# EAGLE board 4081_4 (EAGLE 5.06)
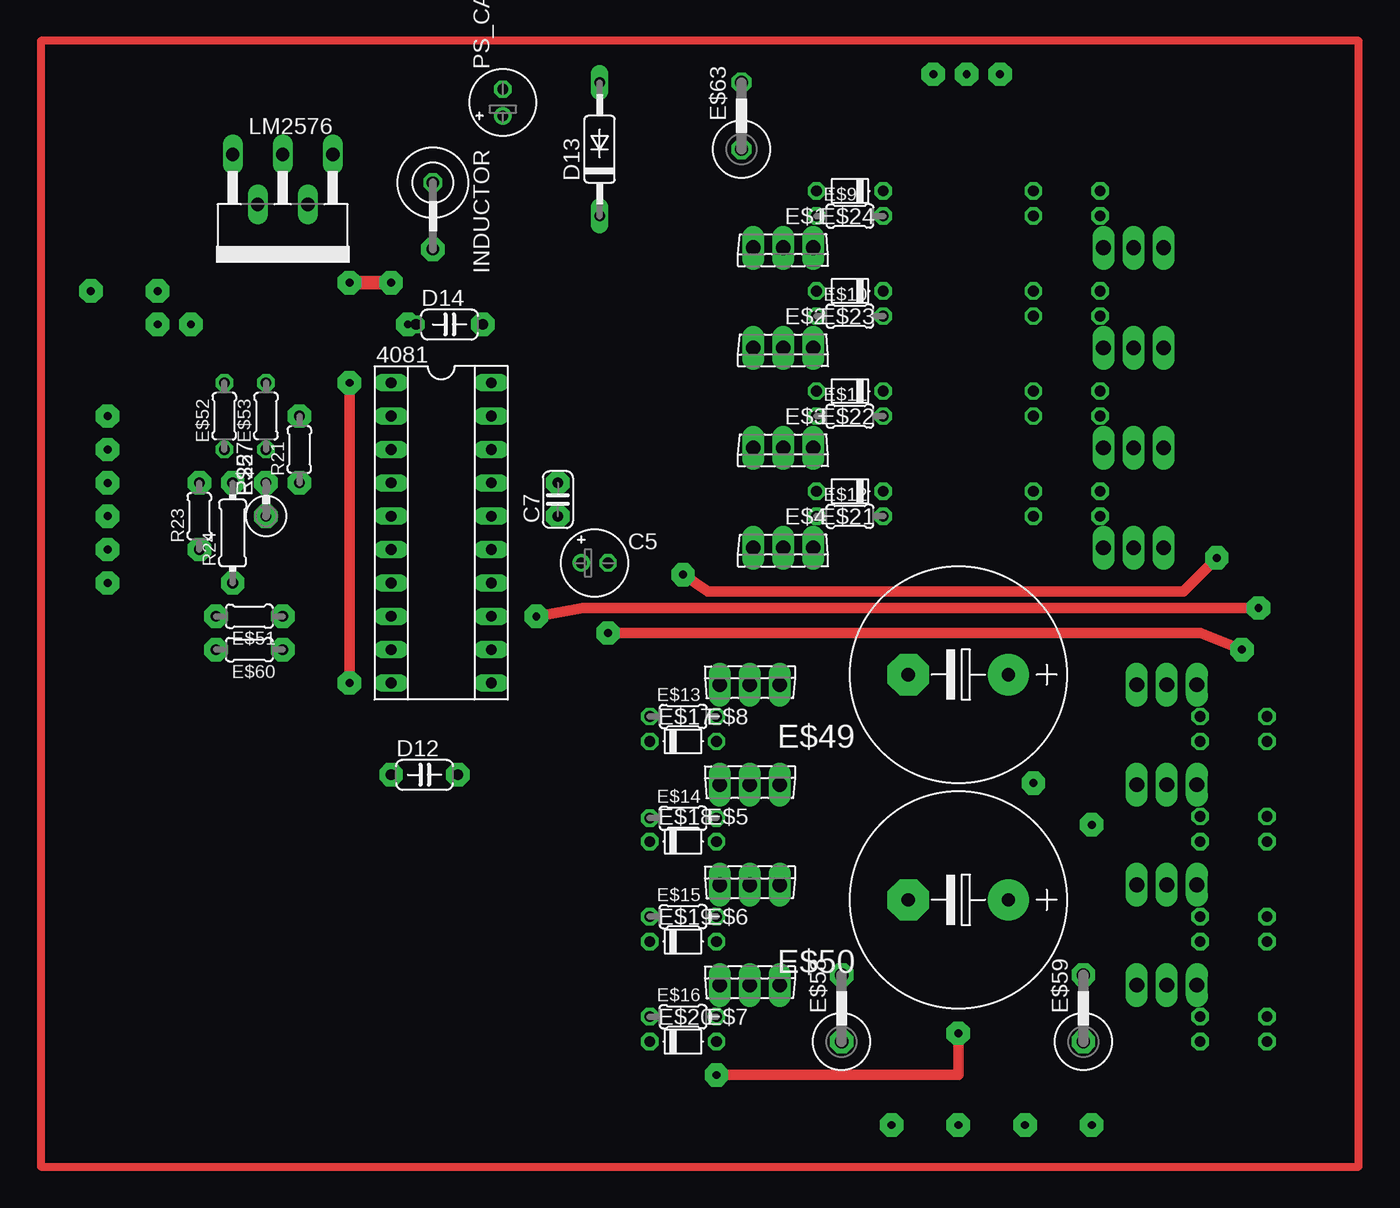
[diagram p0: board, top side]
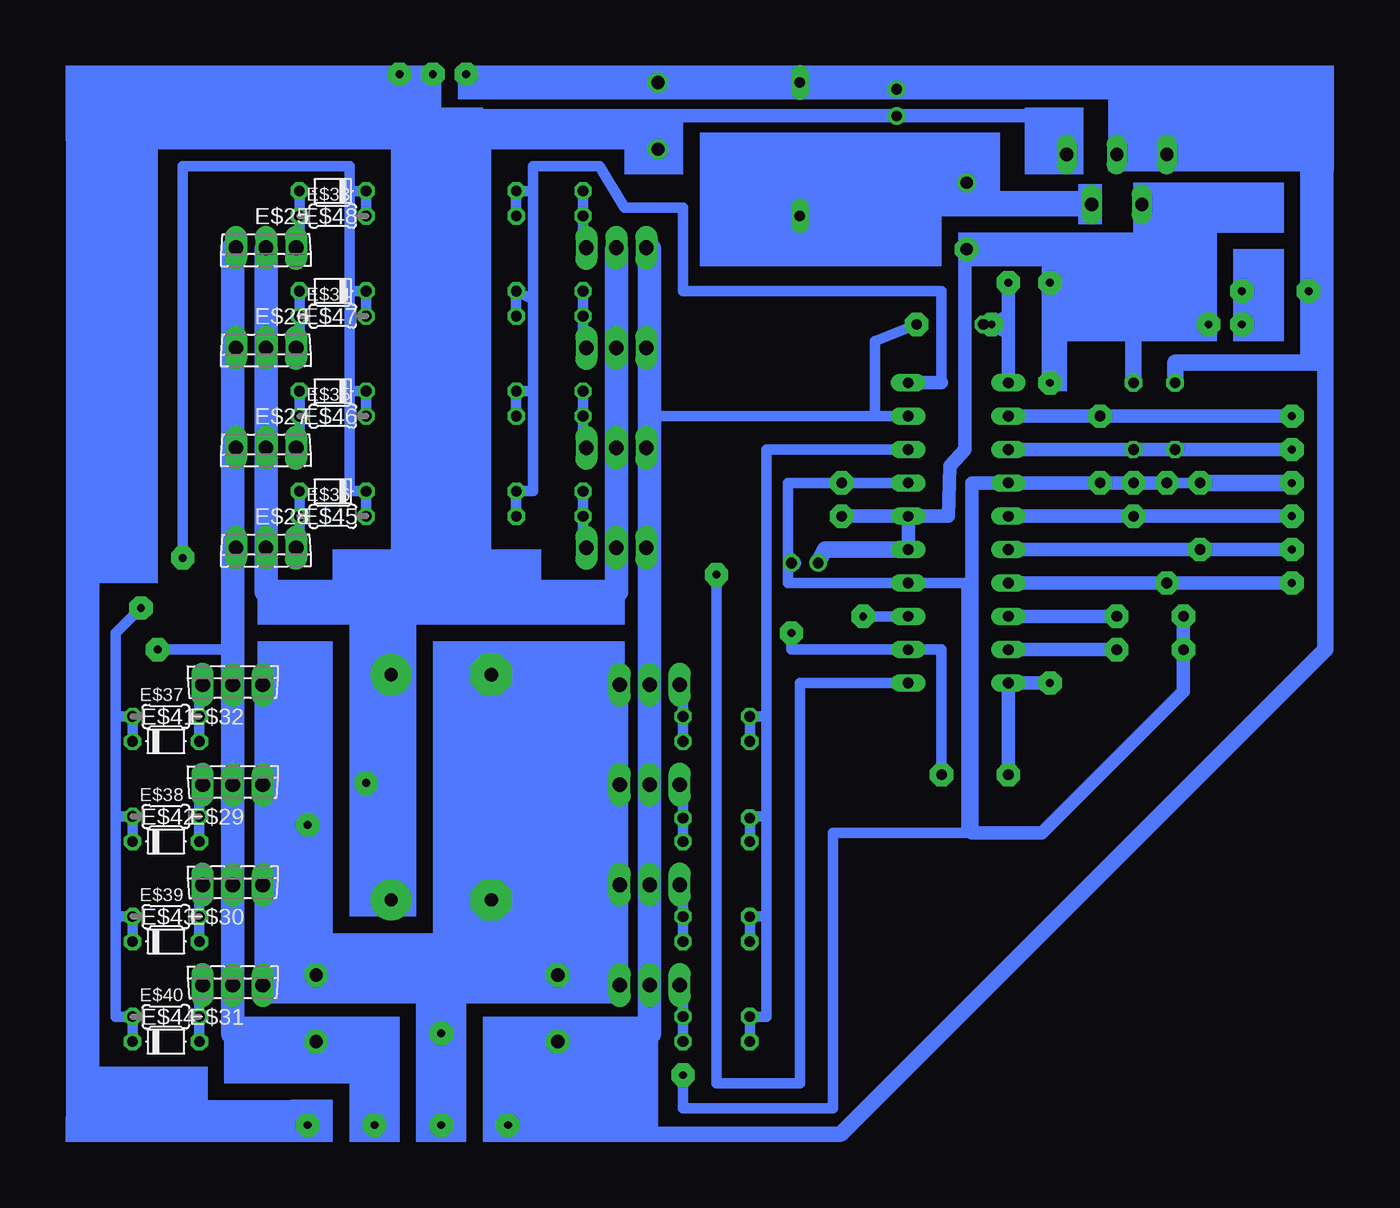
[diagram p1: board, bottom side, seen from below]

No outline drawn. Coordinates in mm, seen from the top.
Copper layers (1*16): Top 0.035mm / dielectric 1.5mm / Bottom 0.035mm
Design rules "default": minimum track width 10mil, minimum drill 24mil, track to track 8mil, track to pad 8mil, pad to pad 8mil, via to via 8mil, smd to smd 8mil, copper to edge 40mil, drill to drill 8mil, minimum pad ring 10mil, minimum via ring 8mil, stop-mask expansion 4mil, vias tented up to drill 0mil, thermal gap 10mil

## Footprints (pad centres in the part's own frame; a part is rotated, then mirrored left to right if it is on the bottom)
SOCKET-20 = drill 0.813 long: 1 -11.43,-3.81; 2 -8.89,-3.81; 3 -6.35,-3.81; 4 -3.81,-3.81; 5 -1.27,-3.81; 6 1.27,-3.81; 7 3.81,-3.81; 8 6.35,-3.81; 9 8.89,-3.81; 10 11.43,-3.81; 11 11.43,3.81; 12 8.89,3.81; 13 6.35,3.81; 14 3.81,3.81; 15 1.27,3.81; 16 -1.27,3.81; 17 -3.81,3.81; 18 -6.35,3.81; 19 -8.89,3.81; 20 -11.43,3.81
E2-5 = drill 0.813 pad 1.27 round: + -1.016,0 | drill 0.813 pad 1.27 octagon: - 1.016,0
C025-024X044 = drill 0.813 octagon: 1 -1.27,0; 2 1.27,0
C050-024X044 = drill 0.813 octagon: 1 -2.54,0; 2 2.54,0
C2992 = drill 0.813 long: A 5.08,0; C -5.08,0
C369-1 = drill 1.118 long: D 0,-1.397; G -2.286,-1.397; S 2.286,-1.397
0204/5 = drill 0.813 octagon: 1 -2.54,0; 2 2.54,0
D-5 = drill 0.813 octagon: A 2.54,0; C -2.54,0
E7,5-16 = drill 1.016 pad 3.15 round: + -3.81,0 | drill 1.016 pad 3.15 octagon: - 3.81,0
0309V = drill 0.813 octagon: 1 -1.27,0; 2 1.27,0
0414V = drill 1.016 octagon: 1 -2.54,0; 2 2.54,0
LBC-SE = drill 0.914 octagon: 1 -2.54,0; 2 2.54,0
CB360 = drill 1.016 long: 1 -3.81,-8.255; 2 -1.905,-4.445; 3 0,-8.255; 4 1.905,-4.445; 5 3.81,-8.255
0204/7 = drill 0.813 octagon: 1 -3.81,0; 2 3.81,0

## Placement (x,y rotation side)
4081  [SOCKET-20]  20.95,39.37 270 top
C5  330uF  [E2-5]  32.64,37.08 0 top
C7  .47uf  [C025-024X044]  29.84,41.91 90 top
D12  [C050-024X044]  19.68,20.95 0 top
D13  [C2992]  33.02,68.58 90 top
D14  [C050-024X044]  21.59,55.24 0 top
E$1  [C369-1]  46.99,59.69 180 top
E$2  [C369-1]  46.99,52.07 180 top
E$3  [C369-1]  46.99,44.45 180 top
E$4  [C369-1]  46.99,36.83 180 top
E$5  [C369-1]  44.45,21.59 0 top
E$6  [C369-1]  44.45,13.97 0 top
E$7  [C369-1]  44.45,6.35 0 top
E$8  [C369-1]  44.45,29.21 0 top
E$9  [0204/5]  52.07,63.5 0 top
E$10  [0204/5]  52.07,55.88 0 top
E$11  [0204/5]  52.07,48.26 0 top
E$12  [0204/5]  52.07,40.64 0 top
E$13  [0204/5]  39.37,25.4 0 top
E$14  [0204/5]  39.37,17.65 0 top
E$15  [0204/5]  39.37,10.16 0 top
E$16  [0204/5]  39.37,2.54 0 top
E$17  [D-5]  39.37,23.5 0 top
E$18  [D-5]  39.37,15.88 0 top
E$19  [D-5]  39.37,8.26 0 top
E$20  [D-5]  39.37,0.64 0 top
E$21  [D-5]  52.07,42.55 180 top
E$22  [D-5]  52.07,50.16 180 top
E$23  [D-5]  52.07,57.78 180 top
E$24  [D-5]  52.07,65.41 180 top
E$25  [C369-1]  73.66,59.69 180 bottom
E$26  [C369-1]  73.66,52.07 180 bottom
E$27  [C369-1]  73.66,44.45 180 bottom
E$28  [C369-1]  73.66,36.83 180 bottom
E$29  [C369-1]  76.2,21.59 0 bottom
E$30  [C369-1]  76.2,13.97 0 bottom
E$31  [C369-1]  76.2,6.35 0 bottom
E$32  [C369-1]  76.2,29.21 0 bottom
E$33  [0204/5]  68.58,63.5 0 bottom
E$34  [0204/5]  68.58,55.88 0 bottom
E$35  [0204/5]  68.58,48.26 0 bottom
E$36  [0204/5]  68.58,40.64 0 bottom
E$37  [0204/5]  81.28,25.4 0 bottom
E$38  [0204/5]  81.28,17.78 0 bottom
E$39  [0204/5]  81.28,10.16 0 bottom
E$40  [0204/5]  81.28,2.54 0 bottom
E$41  [D-5]  81.28,23.5 0 bottom
E$42  [D-5]  81.28,15.88 0 bottom
E$43  [D-5]  81.28,8.26 0 bottom
E$44  [D-5]  81.28,0.64 0 bottom
E$45  [D-5]  68.58,42.55 180 bottom
E$46  [D-5]  68.58,50.16 180 bottom
E$47  [D-5]  68.58,57.78 180 bottom
E$48  [D-5]  68.58,65.41 180 bottom
E$49  [E7,5-16]  60.33,28.57 180 top
E$50  [E7,5-16]  60.33,11.43 180 top
E$51  [0204/5]  6.35,33.02 180 top
E$52  [0204/5]  4.45,48.26 90 top
E$53  [0204/5]  7.62,48.26 90 top
E$57  [0309V]  7.62,41.91 90 top
E$58  [0414V]  51.44,3.17 90 top
E$59  [0414V]  69.85,3.17 90 top
E$60  [0204/5]  6.35,30.48 180 top
E$63  [0414V]  43.81,71.12 90 top
INDUCTOR  330uH  [LBC-SE]  20.32,63.5 270 top
LM2576  [CB360]  8.89,59.94 180 top
PS_CAP2  100uF  [E2-5]  25.65,72.14 90 top
R21  [0204/5]  10.16,45.72 90 top
R22  [0309V]  7.62,41.91 90 top
R23  [0204/5]  2.54,40.64 90 top
R24  [0204/7]  5.08,39.37 90 top

## Library data of the parts
4081 = ic-package
C5 C7 D12 D14 E$9-E$16 E$33-E$40 E$49-E$53 E$57-E$60 E$63 PS_CAP2 R21-R24 = rcl
D13 E$17-E$24 E$41-E$48 = diode
E$1-E$8 E$25-E$32 = ref-packages
INDUCTOR = inductors
LM2576 = linear

## Nets
GND2: 4081.4
S$2: 4081.19
S$5: 4081.13 E$41.C E$42.C E$43.C E$44.C
S$6: E$17.A
S$7: E$18.A
S$8: E$19.A
S$9: E$20.A
S$10: 4081.18 E$17.C E$18.C E$19.C E$20.C
S$11: 4081.10 4081.15 4081.16 C5.+
S$12: E$21.A
S$13: E$24.A
S$14: E$23.A
S$15: E$22.A
S$16: 4081.20 E$9.2 E$10.2 E$11.2 E$12.2 E$21.C E$22.C E$23.C E$24.C
S$17: 4081.11 E$33.2 E$34.2 E$35.2 E$36.2 E$45.C E$46.C E$47.C E$48.C
S$19: 4081.12
S$20: E$41.A
S$21: E$42.A
S$22: E$43.A
S$23: E$44.A
S$25: E$45.A
S$27: E$48.A
S$28: E$47.A
S$29: E$46.A
S$30: 4081.14 4081.17 E$49.-
S$34: 4081.1
S$36: E$50.+
S$37: INDUCTOR.1
S$38: C5.-
S$41: E$52.2
S$43: E$53.2
S$76: 4081.2
S$78: 4081.3
S$79: 4081.5
S$80: 4081.9
S$81: 4081.8
S$83: 4081.6
S$84: 4081.7

## Tracks (layer width: path | path; a pad name or v marks a point on that pad's centre or on a via)
GND2  (via drill 0.6 pad 1.78)
  Bottom 0.813: v5.08,43.18 v2.54,43.18
  Bottom 1.016: v5.08,43.18 v7.62,43.18 v10.16,43.18 4081.4 19.94,43.18 19.94,16.51 14.61,16.51 3.81,27.3 v3.81,30.48 v3.81,33.02
S$1
  Top 0.61: -9.53,-8.89 90.81,-8.89 90.81,76.83 -9.53,76.83 -9.53,-8.89
S$2  (via drill 0.6 pad 1.78)
  Bottom 0.813: 44.45,48.26 27.3,48.26 | 4081.19 27.3,48.26 | 27.3,48.26 27.3,53.98 v24.13,55.24
  Bottom 1.778: v55.24,-5.71 55.24,1.27 44.45,1.27 44.45,48.26 44.45,60.96
S$3
  Bottom 1.016: 29.84,-6.35 46.35,-6.35
  Bottom 1.27: 29.84,-6.35 -6.99,30.48 -6.99,67.31
S$4
  Bottom 1.778: 46.99,5.08 46.99,27.94
S$5  (via drill 0.6 pad 1.78)
  Top 0.813: v83.19,33.66 31.75,33.66 v28.19,33.02
  Bottom 0.813: E$44.C 83.82,2.54 85.09,2.54 85.09,10.16 | 85.09,10.16 85.09,17.78 | 85.09,17.78 85.09,25.4 | E$41.C 83.82,25.4 85.09,25.4 | E$42.C 83.82,17.78 85.09,17.78 | E$43.C 83.82,10.16 85.09,10.16 | 85.09,25.4 85.09,31.75 v83.19,33.66 | v28.19,33.02 4081.13
S$6
  Bottom 0.813: E$17.A 41.91,27.94
S$7
  Bottom 0.813: 41.91,20.32 E$18.A
S$8
  Bottom 0.813: 41.91,12.7 E$19.A
S$9
  Bottom 0.813: 41.91,5.08 E$20.A
S$10
  Bottom 0.813: E$20.C 36.83,2.54 35.56,2.54 35.56,10.16 | 35.56,10.16 35.56,17.78 | 35.56,17.78 35.56,25.4 | E$17.C 36.83,25.4 35.56,25.4 | E$18.C 36.83,17.78 35.56,17.78 | E$19.C 36.83,10.16 35.56,10.16 | 35.56,25.4 35.56,45.72 4081.18
S$11  (via drill 0.6 pad 1.78)
  Top 0.813: v13.97,27.94 v13.97,50.8
  Bottom 1.016: 6.35,64.14 6.35,60.96 13.97,60.96 | 4081.16 4081.15 4081.16 | 4081.16 v29.84,40.64 | 4081.16 21.72,40.64 21.59,44.45 20.45,45.72 20.45,60.96 13.97,60.96 | v13.97,58.42 13.97,60.96 | v13.97,58.42 13.97,60.33 | v13.97,50.8 v13.97,58.42 | v13.97,27.94 4081.10 v17.14,20.95
  Bottom 1.27: 4081.15 31.11,38.1 C5.+
S$12
  Bottom 0.813: 49.53,38.1 E$21.A
S$13
  Bottom 0.813: E$24.A 49.53,60.96
S$14
  Bottom 0.813: E$23.A 49.53,53.34
S$15
  Bottom 0.813: E$22.A 49.53,45.72
S$16
  Bottom 0.813: E$9.2 E$24.C 53.34,65.41 | E$10.2 E$23.C 53.34,57.15 | E$11.2 E$22.C 53.34,50.16 | E$12.2 E$21.C 53.34,42.55 53.34,50.16 | 53.34,57.15 53.34,50.16 | 53.34,65.41 53.34,57.15 | 53.34,65.41 53.34,67.31 48.26,67.31 46.35,64.14 41.91,64.14 41.91,57.78 22.23,57.78 22.23,50.8
  Bottom 1.016: 22.23,50.8 4081.20
S$17  (via drill 0.6 pad 1.78)
  Top 0.813: v80.01,37.47 77.47,34.92 41.27,34.92 v39.37,36.2
  Bottom 0.813: E$36.2 E$45.C 67.31,42.55 67.31,50.16 | E$35.2 E$46.C 67.31,50.16 | E$34.2 E$47.C 67.31,57.78 | E$33.2 E$48.C 67.31,65.41 | 67.31,57.78 67.31,50.16 | 67.31,65.41 67.31,57.78 | 67.31,65.41 67.31,67.31 80.01,67.31 v80.01,37.47 | v39.37,36.2 39.37,-2.54 33.02,-2.54 33.02,27.94 4081.11
S$18  (via drill 0.6 pad 1.78)
  other vias: 51.44,0.64
S$19  (via drill 0.6 pad 1.78)
  Top 0.813: v81.92,30.48 78.74,31.75 v33.66,31.75
  Bottom 0.813: v81.92,30.48 76.2,30.48 | v33.66,31.75 33.66,30.48 4081.12 22.23,30.48 v22.23,20.95
  Bottom 1.778: 76.2,60.96 76.2,30.48 76.2,1.27 65.41,1.27
  Bottom 2.54: v65.41,-5.71 65.41,1.27
S$20
  Bottom 0.813: E$41.A 78.74,27.94
S$21
  Bottom 0.813: 78.74,20.32 E$42.A
S$22
  Bottom 0.813: 78.74,12.7 E$43.A
S$23
  Bottom 0.813: 78.74,5.08 E$44.A
S$24
  Bottom 1.016: 21.59,64.14 33.02,64.14
S$25
  Bottom 0.813: 71.12,38.1 E$45.A
S$26  (via drill 0.6 pad 1.78)
  other vias: 51.44,5.71
S$27
  Bottom 0.813: E$48.A 71.12,60.96
S$28
  Bottom 0.813: E$47.A 71.12,53.34
S$29
  Bottom 0.813: E$46.A 71.12,45.72
S$30  (via drill 0.6 pad 1.78)
  Top 0.813: v60.33,1.27 60.33,-1.91 v41.91,-1.91
  Bottom 0.813: v41.91,-1.91 41.91,-4.45 30.48,-4.45 30.48,16.51 20.32,16.51 20.32,35.56 4081.14 33.91,35.56 33.91,43.18 v29.84,43.18 4081.17
  Bottom 1.778: 46.99,4.45 55.24,4.45 | 55.24,4.45 60.33,4.45 | 60.33,4.45 73.66,4.45 73.66,27.94 | E$49.- 55.24,4.45 | v60.33,-5.71 v60.33,1.27 60.33,4.45
S$31  (via drill 0.6 pad 1.78)
  other vias: 69.85,0.64
S$32  (via drill 0.6 pad 1.78)
  other vias: 69.85,5.71
S$33  (via drill 0.6 pad 1.78)
  other vias: 66.04,20.32
S$34  (via drill 0.6 pad 1.78)
  Top 1.016: v17.14,58.42 13.97,58.42
  Bottom 1.016: 4081.1 17.14,55.88 v18.41,55.24 17.14,54.61 v17.14,58.42
S$35  (via drill 0.6 pad 1.78)
  other vias: 70.48,17.14
S$36
  Bottom 0.406: 60.33,69.85 59.69,69.85
  Bottom 0.813: 60.33,34.92 60.33,69.85
  Bottom 1.778: 46.99,60.96 46.99,34.92 60.33,34.92 65.41,34.92 | 73.66,60.96 73.66,34.92 65.41,34.92 | E$50.+ 65.41,34.92
S$37
  Bottom 1.016: INDUCTOR.1 20.32,64.77 11.43,64.77
S$38
  Bottom 1.27: C5.- 33.53,37.08
S$39  (via drill 0.6 pad 1.78)
  other vias: 20.32,60.96
S$40  (via drill 0.6 pad 1.78)
  Bottom 1.016: 60.96,69.85 v60.96,74.3 v63.5,74.3 63.5,69.85
  Bottom 2.54: 60.96,69.85 63.5,69.85 87.63,69.85 87.63,-5.08 71.12,-5.08 v70.48,-5.71
S$41
  Bottom 1.27: E$52.2 4.45,52.32 -6.86,52.32
S$42
  Bottom 1.016: 57.78,69.85 57.78,71.12 13.97,71.12 13.97,67.31
S$43
  Bottom 1.27: 7.62,51.05 E$53.2 7.62,54.23
S$44  (via drill 0.6 pad 1.78)
  Bottom 1.27: 1.91,43.18 v-4.45,43.18
S$45  (via drill 0.6 pad 1.78)
  Bottom 1.016: v58.42,74.3 8.89,74.3 8.89,67.31
S$46  (via drill 0.6 pad 1.78)
  other vias: 1.91,55.24
S$47  (via drill 0.6 pad 1.78)
  other vias: -0.64,55.24
S$48  (via drill 0.6 pad 1.78)
  other vias: -0.64,57.78
S$49  (via drill 0.6 pad 1.78)
  other vias: -5.71,57.78
S$76  (via drill 0.6 pad 1.78)
  Bottom 1.016: 4081.2 v10.16,48.26 v-4.45,48.26
S$78  (via drill 0.6 pad 1.78)
  Bottom 1.016: 4081.3 v-4.45,45.72
S$79  (via drill 0.6 pad 1.78)
  Bottom 1.016: 4081.5 v7.62,40.64 v-4.45,40.64
S$80  (via drill 0.6 pad 1.78)
  Bottom 1.016: v8.89,30.48 4081.9
S$81  (via drill 0.6 pad 1.78)
  Bottom 1.016: 4081.8 v8.89,33.02
S$83  (via drill 0.6 pad 1.78)
  Bottom 1.016: 4081.6 v2.54,38.1 v-4.45,38.1
S$84  (via drill 0.6 pad 1.78)
  Bottom 1.016: 4081.7 v5.08,35.56 v-4.45,35.56
(copper drawn outside any net)
  shapes: Bottom area x55